# Altium PCB LPCB279R0__ASCII.PcbDoc
Units mm, origin at the board's own origin, x right, y up, seen from the top; angles counter-clockwise.
Board outline 96 x 109 mm, 2 copper layers (Top Layer, Bottom Layer); 115 components, 90 nets, 384 pads, 24 vias.
Unrouted connection lines stored in the file: 150.
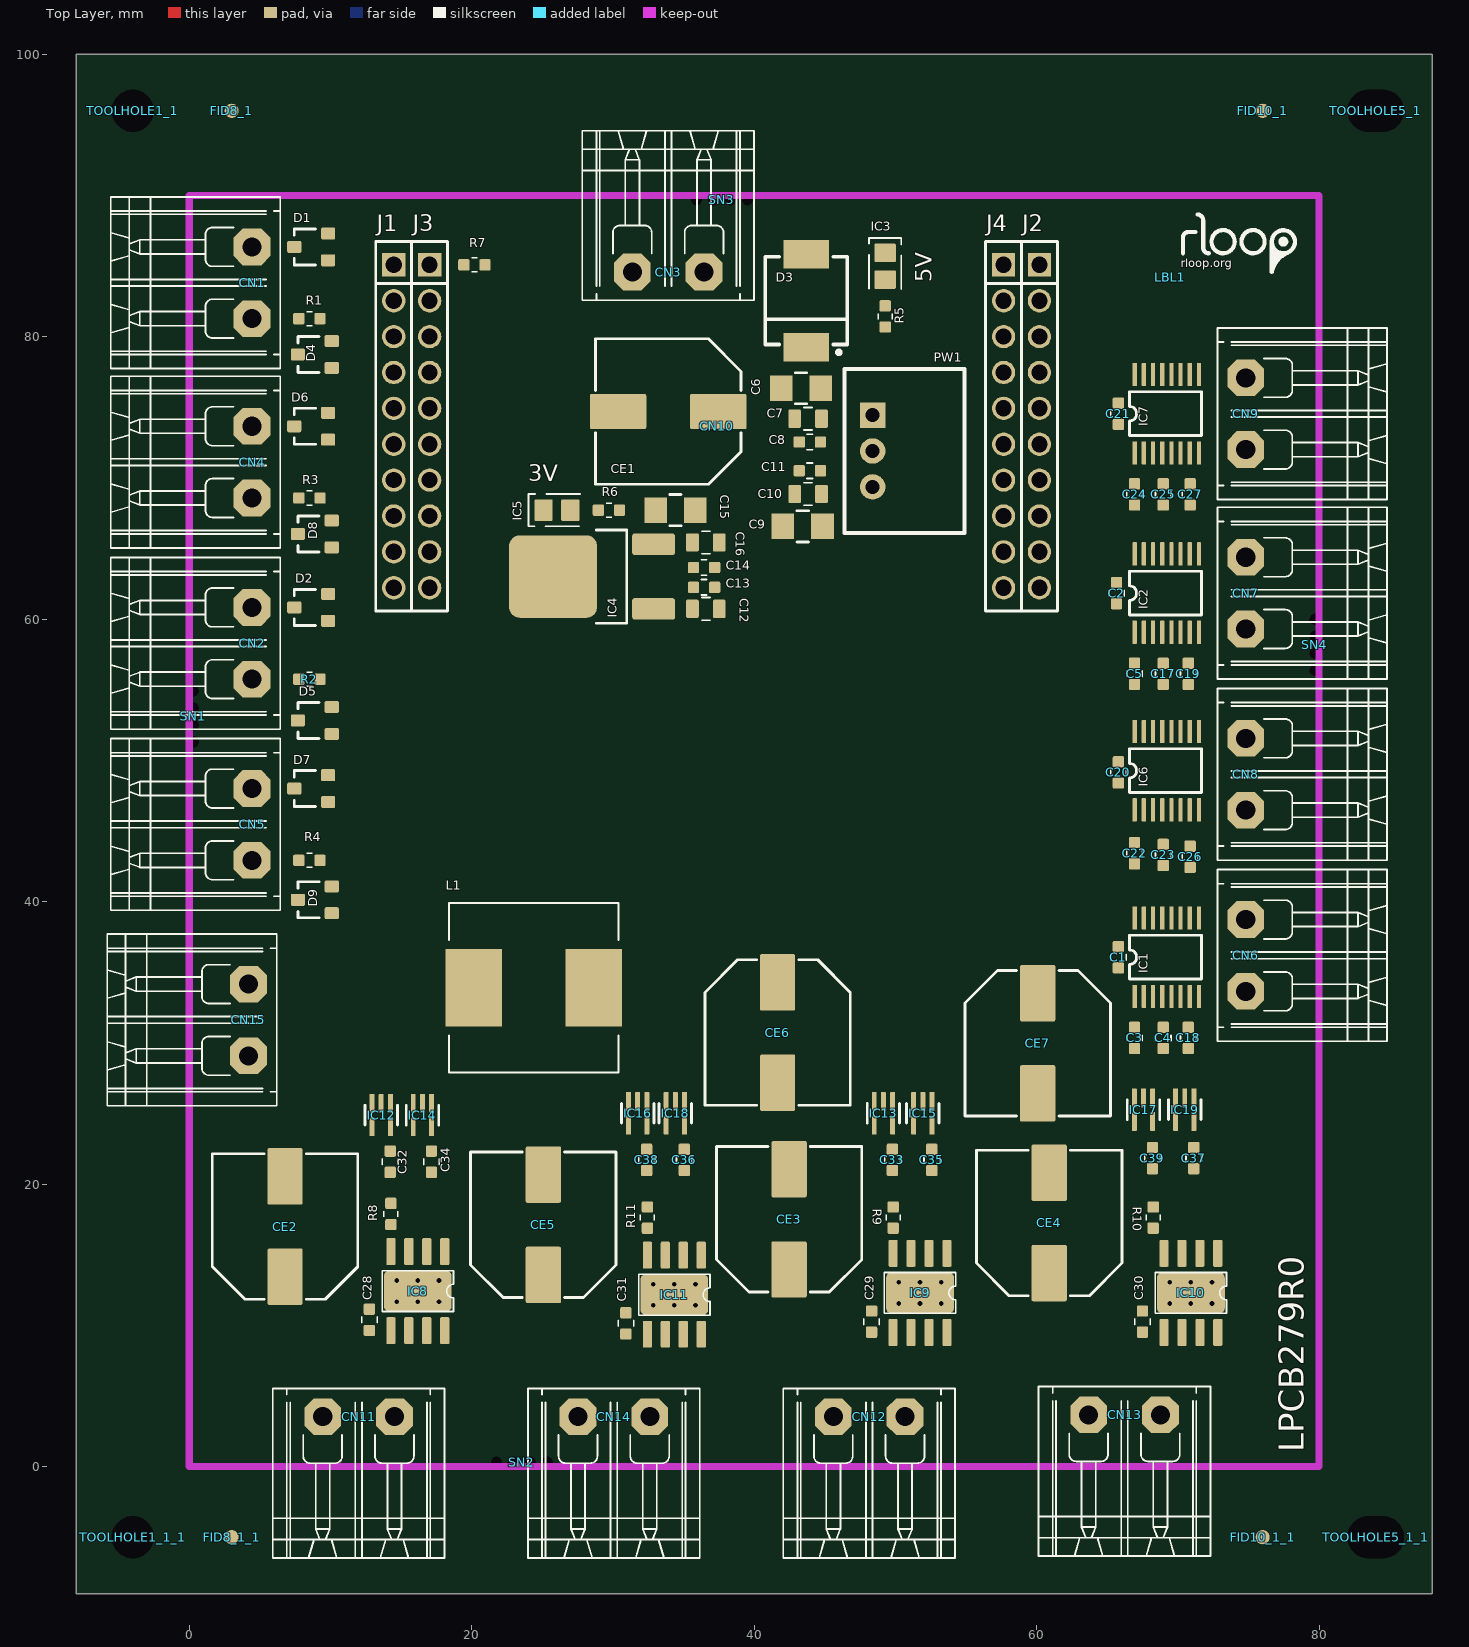
[diagram p0: Top Layer view]
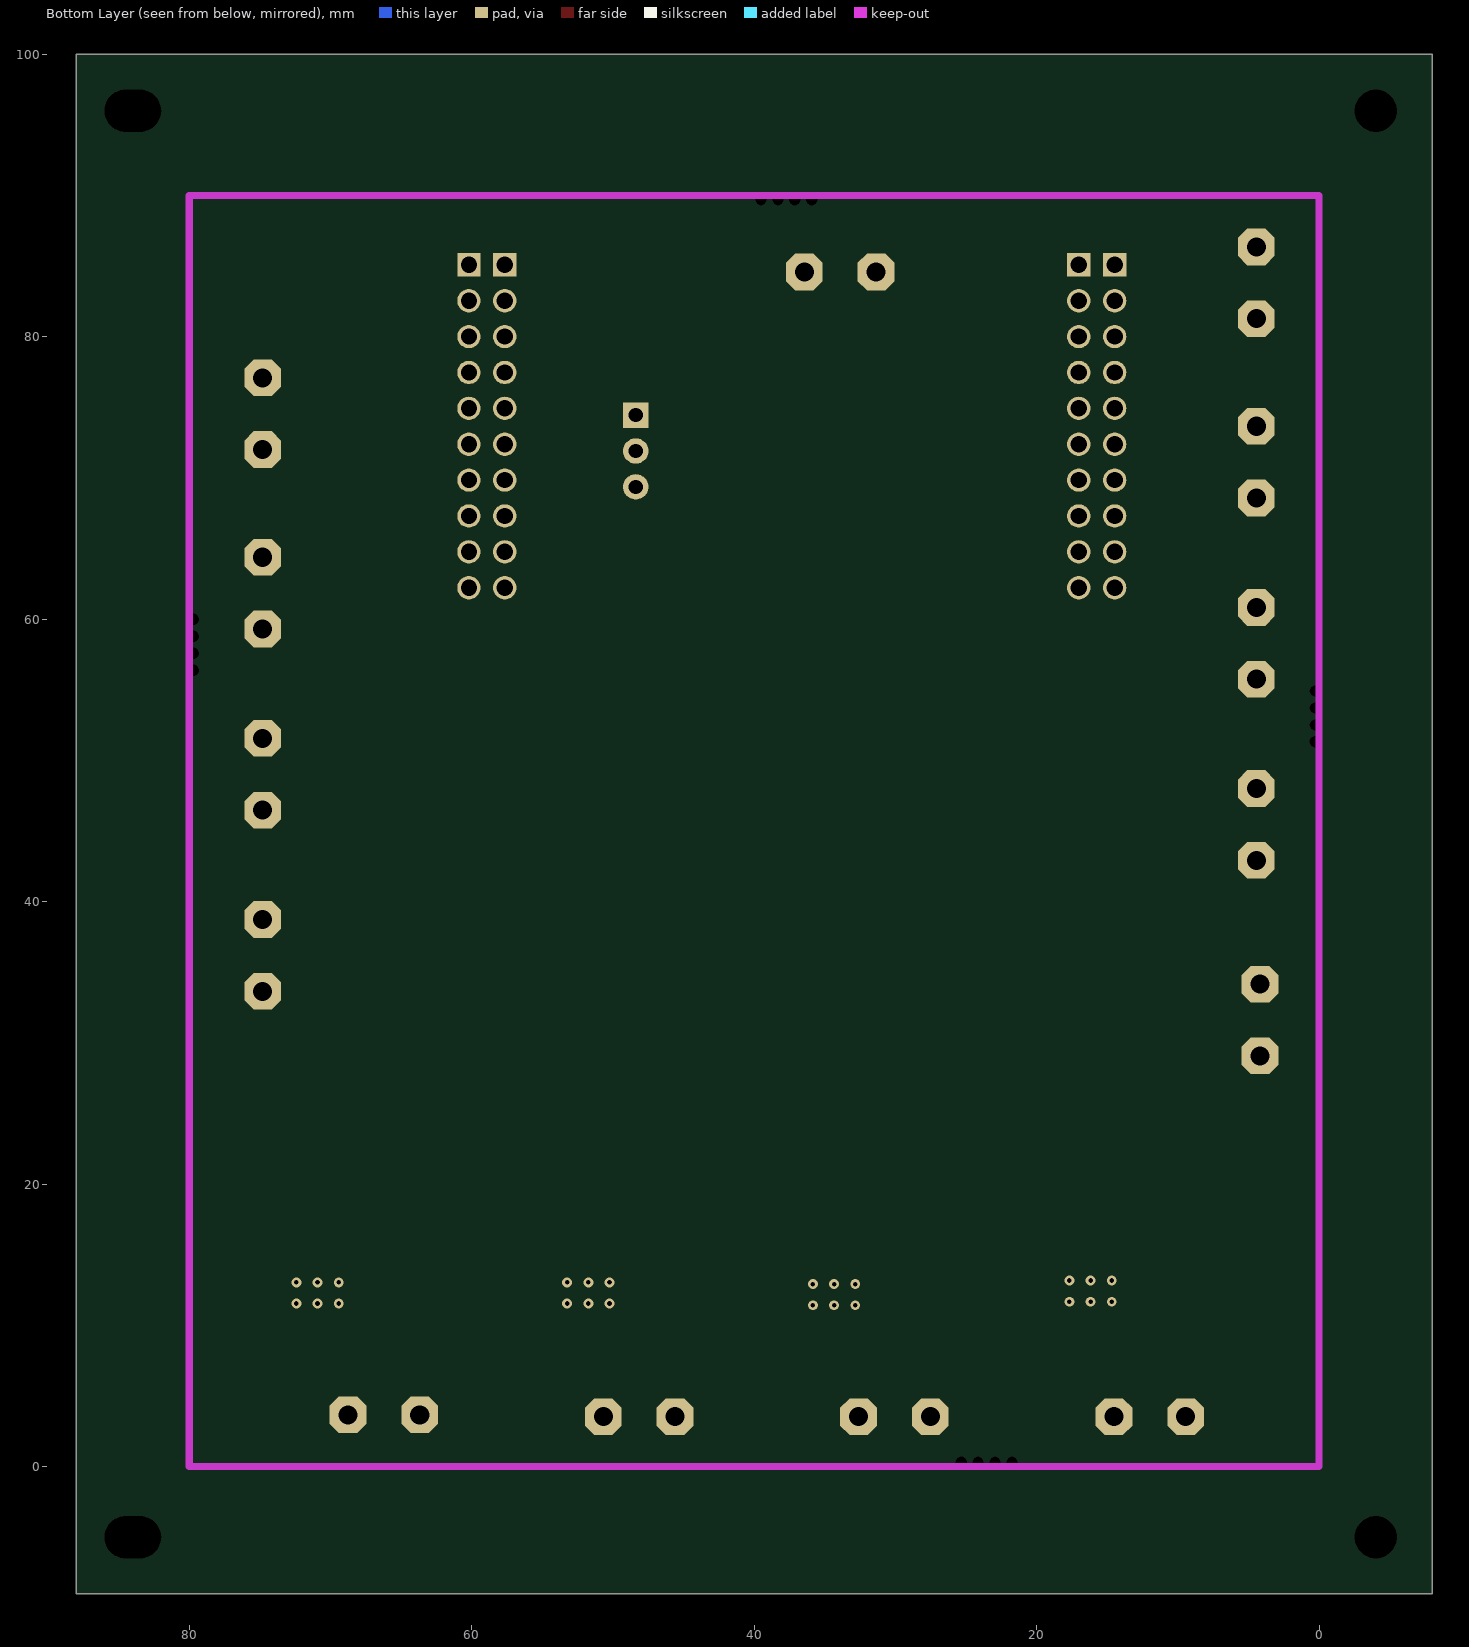
[diagram p1: Bottom Layer view, seen from below]

## Layer stack, top to bottom
Top Layer: signal copper 0.0356
Dielectric: dielectric 0.32, FR-4, Dk 4.8
Bottom Layer: signal copper 0.0356

## Board outline
-8,-9 -8,100 88,100 88,-9

## Design rules (kind name [scope] priority, off if disabled: settings)
AssemblyTestPointUsage [All] p0: scope1count=1 scope1_0_kind=Board scope1_0_value=Board scope2count=1 scope2_0_kind=Board scope2_0_value=Board commentlength=0
AssemblyTestpoint [All] p0: scope1count=1 scope1_0_kind=Board scope1_0_value=Board scope2count=1 scope2_0_kind=Board scope2_0_value=Board commentlength=0
Clearance [All] p0: scope1count=1 scope1_0_kind=Board scope1_0_value=Board scope2count=1 scope2_0_kind=Board scope2_0_value=Board commentlength=0 gap=0.16
Clearance [All] p1: gap=0.16
ComponentClearance [All] p0: scope1count=1 scope1_0_kind=Board scope1_0_value=Board scope2count=1 scope2_0_kind=Board scope2_0_value=Board commentlength=0 gap=0.254 collisioncheckmode=3
DiffPairsRouting [All] p0: scope1count=1 scope1_0_kind=Board scope1_0_value=Board scope2count=1 scope2_0_kind=Board scope2_0_value=Board commentlength=0
FabricationTestPointUsage [All] p0: scope1count=1 scope1_0_kind=Board scope1_0_value=Board scope2count=1 scope2_0_kind=Board scope2_0_value=Board commentlength=0 valid=0 allowmultiple=FALSE
FabricationTestpoint [All] p0: scope1count=1 scope1_0_kind=Board scope1_0_value=Board scope2count=1 scope2_0_kind=Board scope2_0_value=Board commentlength=0 side=3 testpointundercomponent=TRUE minsize=1.016 maxsize=2.54 preferedsize=1.524 minholesize=0 maxholesize=1.016 preferedholesize=0.813 testpointgrid=0.025
FanoutControl Fanout_Default [All] p0: scope1count=1 scope1_0_kind=Board scope1_0_value=Board scope2count=1 scope2_0_kind=Board scope2_0_value=Board commentlength=30 // Fanout_Default (Default Rule)
FanoutControl Fanout_Small [All] p0 off: scope1count=1 scope1_0_kind=Board scope1_0_value=Board scope2count=1 scope2_0_kind=Board scope2_0_value=Board commentlength=84 // Protel DXP Scope 1 Expression Was: (CompPinCount < 5)   Fanout_Small (Default Rule)
FanoutControl Fanout_SOIC [All] p0 off: scope1count=1 scope1_0_kind=Board scope1_0_value=Board scope2count=1 scope2_0_kind=Board scope2_0_value=Board commentlength=71 // Protel DXP Scope 1 Expression Was: IsSOIC   Fanout_SOIC (Default Rule)
FanoutControl Fanout_LCC [All] p0 off: scope1count=1 scope1_0_kind=Board scope1_0_value=Board scope2count=1 scope2_0_kind=Board scope2_0_value=Board commentlength=69 // Protel DXP Scope 1 Expression Was: IsLCC   Fanout_LCC (Default Rule)
FanoutControl Fanout_BGA [All] p0 off: scope1count=1 scope1_0_kind=Board scope1_0_value=Board scope2count=1 scope2_0_kind=Board scope2_0_value=Board commentlength=69 // Protel DXP Scope 1 Expression Was: IsBGA   Fanout_BGA (Default Rule)
Height [All] p0 off: scope1count=1 scope1_0_kind=Board scope1_0_value=Board scope2count=1 scope2_0_kind=Board scope2_0_value=Board commentlength=0
Height [All] p1 off: minheight=0 maxheight=25.4 prefheight=12.7
HoleSize [All] p0: scope1count=1 scope1_0_kind=Board scope1_0_value=Board scope2count=1 scope2_0_kind=Board scope2_0_value=Board commentlength=0 absolutevalues=TRUE maxlimit=6 minlimit=0.025 maxpercent=80.000 minpercent=20.000
HoleSize [All] p1: absolutevalues=TRUE maxlimit=6 minlimit=0.025 maxpercent=80.000 minpercent=20.000
HoleToHoleClearance [All] p0: scope1count=1 scope1_0_kind=Board scope1_0_value=Board scope2count=1 scope2_0_kind=Board scope2_0_value=Board commentlength=0
LayerPairs [All] p0: scope1count=1 scope1_0_kind=Board scope1_0_value=Board scope2count=1 scope2_0_kind=Board scope2_0_value=Board commentlength=0 enforce=TRUE
MinimumSolderMaskSliver [All] p0 off: scope1count=1 scope1_0_kind=Board scope1_0_value=Board scope2count=1 scope2_0_kind=Board scope2_0_value=Board commentlength=0
MinimumSolderMaskSliver [All] p1 off: minsoldermaskwidth=0.1
NetAntennae [All] p0: scope1count=1 scope1_0_kind=Board scope1_0_value=Board scope2count=1 scope2_0_kind=Board scope2_0_value=Board commentlength=0
PasteMaskExpansion [All] p0: scope1count=1 scope1_0_kind=Board scope1_0_value=Board scope2count=1 scope2_0_kind=Board scope2_0_value=Board commentlength=0 expansion=0
PlaneClearance [All] p0: scope1count=1 scope1_0_kind=Board scope1_0_value=Board scope2count=1 scope2_0_kind=Board scope2_0_value=Board commentlength=0 clearance=0.508
PlaneConnect [All] p0: scope1count=1 scope1_0_kind=Board scope1_0_value=Board scope2count=1 scope2_0_kind=Board scope2_0_value=Board commentlength=0 planeconnectstyle=Relief reliefexpansion=0.508 reliefentries=4 reliefconductorwidth=0.254 reliefairgap=0.254
PlaneConnect PlaneConnect_1 [All] p0 off: scope1count=1 scope1_0_kind=Board scope1_0_value=Board scope2count=1 scope2_0_kind=Board scope2_0_value=Board commentlength=44 planeconnectstyle=Direct reliefexpansion=0.508 reliefentries=4 reliefconductorwidth=0.254 reliefairgap=0.254 // Protel DXP Scope 1 Expression Was: IsVia
PlaneConnect PlaneConnect_1 [IsVia] p1: planeconnectstyle=Direct reliefexpansion=0.508 reliefentries=4 reliefconductorwidth=0.254 reliefairgap=0.254
PlaneConnect [All] p2: planeconnectstyle=Relief reliefexpansion=0.508 reliefentries=4 reliefconductorwidth=0.254 reliefairgap=0.254
PolygonConnect PolygonConnect_1 [All] p0: scope1count=1 scope1_0_kind=Board scope1_0_value=Board scope2count=1 scope2_0_kind=Board scope2_0_value=Board commentlength=0 connectstyle=Direct reliefconductorwidth=0.254 reliefentries=4 polygonreliefangle="90 Angle"
PolygonConnect [All] p0 off: scope1count=1 scope1_0_kind=Board scope1_0_value=Board scope2count=1 scope2_0_kind=Board scope2_0_value=Board commentlength=44 connectstyle=Direct reliefconductorwidth=0.254 reliefentries=4 polygonreliefangle="90 Angle" // Protel DXP Scope 1 Expression Was: IsVia
PolygonConnect [IsVia] p1: connectstyle=Direct reliefconductorwidth=0.254 reliefentries=4 polygonreliefangle="90 Angle" airgapwidth=0.254
PolygonConnect PolygonConnect_1 [All] p2: connectstyle=Direct reliefconductorwidth=0.254 reliefentries=4 polygonreliefangle="90 Angle" airgapwidth=0.254
RoomDefinition "U_LPCB279 - RM57 LAUNCH" [All] p0: scope1count=1 scope1_0_kind=ComponentClass scope1_0_value="U_LPCB279 - RM57 LAUNCH" scope2count=1 scope2_0_kind=Board scope2_0_value=Board commentlength=0 region_x1=96000000 region_y1=61950000 region_x2=108850000 region_y2=81750000 confinementstyle=ConfineIn
RoomDefinition "U_LPCB279 - HBRIDGE" [All] p0: scope1count=1 scope1_0_kind=ComponentClass scope1_0_value="U_LPCB279 - HBRIDGE" scope2count=1 scope2_0_kind=Board scope2_0_value=Board commentlength=0 region_x1=96000000 region_y1=50500000 region_x2=167950000 region_y2=56000000 confinementstyle=ConfineIn
RoomDefinition "U_LPCB279 - AND GATES" [All] p0: scope1count=1 scope1_0_kind=ComponentClass scope1_0_value="U_LPCB279 - AND GATES" scope2count=1 scope2_0_kind=Board scope2_0_value=Board commentlength=0 region_x1=95950000 region_y1=47600000 region_x2=116500000 region_y2=50000000 confinementstyle=ConfineIn
RoomDefinition "U_LPCB279 - ANALOG INPUTS" [All] p0: scope1count=1 scope1_0_kind=ComponentClass scope1_0_value="U_LPCB279 - ANALOG INPUTS" scope2count=1 scope2_0_kind=Board scope2_0_value=Board commentlength=0 region_x1=96000000 region_y1=44800000 region_x2=99550000 region_y2=47100000 confinementstyle=ConfineIn
RoomDefinition "LPCB279 - TOP" [All] p0: scope1count=1 scope1_0_kind=ComponentClass scope1_0_value="LPCB279 - TOP" scope2count=1 scope2_0_kind=Board scope2_0_value=Board commentlength=0 region_x1=0 region_y1=0 region_x2=20000000 region_y2=10000000 confinementstyle=ConfineIn
RoomDefinition "U_LPCB279 - POWER" [All] p0: scope1count=1 scope1_0_kind=ComponentClass scope1_0_value="U_LPCB279 - POWER" scope2count=1 scope2_0_kind=Board scope2_0_value=Board commentlength=0 region_x1=127450000 region_y1=67650000 region_x2=141600000 region_y2=87450000 confinementstyle=ConfineIn
RoomDefinition "U_LPCB279 - LIMIT SWITCHES" [All] p0: scope1count=1 scope1_0_kind=ComponentClass scope1_0_value="U_LPCB279 - LIMIT SWITCHES" scope2count=1 scope2_0_kind=Board scope2_0_value=Board commentlength=0 region_x1=127500000 region_y1=60100000 region_x2=193550000 region_y2=67700000 confinementstyle=ConfineIn
RoomDefinition "U_LPCB279 - RM57 LAUNCH" [InComponentClass('U_LPCB279 - RM57 LAUNCH')] p1: confinementstyle=ConfineIn formatcopy=TRUE lockcomponents=FALSE outline 89.155,66.085 121.794,66.085 121.794,116.377 89.155,116.377
RoomDefinition "U_LPCB279 - HBRIDGE" [InComponentClass('U_LPCB279 - HBRIDGE')] p2: confinementstyle=ConfineIn formatcopy=TRUE lockcomponents=FALSE outline 89.155,37.002 271.908,37.002 271.908,50.972 89.155,50.972
RoomDefinition "U_LPCB279 - AND GATES" [InComponentClass('U_LPCB279 - AND GATES')] p3: confinementstyle=ConfineIn formatcopy=TRUE lockcomponents=FALSE outline 89.028,29.636 141.225,29.636 141.225,35.732 89.028,35.732
RoomDefinition "U_LPCB279 - ANALOG INPUTS" [InComponentClass('U_LPCB279 - ANALOG INPUTS')] p4: confinementstyle=ConfineIn formatcopy=TRUE lockcomponents=FALSE outline 89.155,22.524 98.172,22.524 98.172,28.366 89.155,28.366
RoomDefinition "LPCB279 - TOP" [InComponentClass('LPCB279 - TOP')] p5: confinementstyle=ConfineIn formatcopy=TRUE lockcomponents=FALSE outline -154.685,-91.268 -103.885,-91.268 -103.885,-65.868 -154.685,-65.868
RoomDefinition "U_LPCB279 - POWER" [InComponentClass('U_LPCB279 - POWER')] p6: confinementstyle=ConfineIn formatcopy=TRUE lockcomponents=FALSE outline 169.038,80.563 204.979,80.563 204.979,130.855 169.038,130.855
RoomDefinition "U_LPCB279 - LIMIT SWITCHES" [InComponentClass('U_LPCB279 - LIMIT SWITCHES')] p7: confinementstyle=ConfineIn formatcopy=TRUE lockcomponents=FALSE outline 169.165,61.386 336.932,61.386 336.932,80.69 169.165,80.69
RoutingCorners [All] p0: scope1count=1 scope1_0_kind=Board scope1_0_value=Board scope2count=1 scope2_0_kind=Board scope2_0_value=Board commentlength=0 cornerstyle=45-Degree minsetback=2.54 maxsetback=2.54
RoutingLayers [All] p0: scope1count=1 scope1_0_kind=Board scope1_0_value=Board scope2count=1 scope2_0_kind=Board scope2_0_value=Board commentlength=0 top layer=Automatic bottom layer=Automatic
RoutingPriority [All] p0: scope1count=1 scope1_0_kind=Board scope1_0_value=Board scope2count=1 scope2_0_kind=Board scope2_0_value=Board commentlength=0
RoutingTopology [All] p0: scope1count=1 scope1_0_kind=Board scope1_0_value=Board scope2count=1 scope2_0_kind=Board scope2_0_value=Board commentlength=0 topology=Shortest
RoutingVias [All] p0: scope1count=1 scope1_0_kind=Board scope1_0_value=Board scope2count=1 scope2_0_kind=Board scope2_0_value=Board commentlength=0 holewidth=0.6 width=1.2 viastyle="Through Hole" minholewidth=0.3 minwidth=0.6 maxholewidth=1 maxwidth=2
RoutingVias [All] p1: holewidth=0.6 width=1.2 viastyle="Through Hole" minholewidth=0.3 minwidth=0.6 maxholewidth=1 maxwidth=2
ShortCircuit [All] p0: scope1count=1 scope1_0_kind=Board scope1_0_value=Board scope2count=1 scope2_0_kind=Board scope2_0_value=Board commentlength=0 allowed=FALSE
SilkToSilkClearance [All] p0 off: scope1count=1 scope1_0_kind=Board scope1_0_value=Board scope2count=1 scope2_0_kind=Board scope2_0_value=Board commentlength=0
SilkToSilkClearance [All] p1 off: silktosilkclearance=0.1
SilkToSolderMaskClearance [All] p0 off: scope1count=1 scope1_0_kind=Board scope1_0_value=Board scope2count=1 scope2_0_kind=Board scope2_0_value=Board commentlength=44 // Protel DXP Scope 1 Expression Was: IsPad
SilkToSolderMaskClearance [IsPad] p1 off: minsilkscreentomaskgap=0.1 clearancetoexposedcopper=TRUE
SolderMaskExpansion [All] p0: scope1count=1 scope1_0_kind=Board scope1_0_value=Board scope2count=1 scope2_0_kind=Board scope2_0_value=Board commentlength=0 expansion=0.102
SolderMaskExpansion [All] p1: expansion=0.102
UnRoutedNet [All] p0: scope1count=1 scope1_0_kind=Board scope1_0_value=Board scope2count=1 scope2_0_kind=Board scope2_0_value=Board commentlength=0
Width [All] p0: scope1count=1 scope1_0_kind=Board scope1_0_value=Board scope2count=1 scope2_0_kind=Board scope2_0_value=Board commentlength=0 maxlimit=1 minlimit=0.16 preferedwidth=0.2
Width [All] p1: maxlimit=1 minlimit=0.16 preferedwidth=0.2
22 further rules are at their usual default settings.

## Classes and differential pairs
component class "U_LPCB279 - RM57 LAUNCH": CN10 R7
component class "U_LPCB279 - LIMIT SWITCHES": C1 C2 C3 C4 C5 C17 C18 C19 C20 C21 C22 C23 C24 C25 C26 C27 CN6 CN7 CN8 CN9 IC1 IC2 IC6 IC7
component class "U_LPCB279 - AND GATES": C32 C33 C34 C35 C36 C37 C38 C39 IC12 IC13 IC14 IC15 IC16 IC17 IC18 IC19
component class "U_LPCB279 - HBRIDGE": C28 C29 C30 C31 CE2 CE3 CE4 CE5 CE6 CE7 CN11 CN12 CN13 CN14 CN15 IC8 IC9 IC10 IC11 L1 R8 R9 R10 R11
component class "U_LPCB279 - POWER": C6 C7 C8 C9 C10 C11 C12 C13 C14 C15 C16 CE1 CN3 D3 IC3 IC4 IC5 PW1 R5 R6
component class "U_LPCB279 - ANALOG INPUTS": CN1 CN2 CN4 CN5 D1 D2 D4 D5 D6 D7 D8 D9 R1 R2 R3 R4
component class "LPCB279 - TOP": LBL1 SN1 SN2 SN3 SN4

## Components (designator, comment, footprint, x,y, rotation, side; value= is the part's Value field where it differs from the comment)
C1 "100nF / 50V / 10% / SMD 0603" LFP011__CC1608-0603-IPC7351_B 65.786,36.068 r270 top
C2 "100nF / 50V / 10% / SMD 0603" LFP011__CC1608-0603-IPC7351_B 65.659,61.849 r270 top
C3 "100nF / 50V / 10% / SMD 0603" LFP011__CC1608-0603-IPC7351_B 66.929,30.353 r270 top
C4 "100nF / 50V / 10% / SMD 0603" LFP011__CC1608-0603-IPC7351_B 68.961,30.353 r270 top
C5 "100nF / 50V / 10% / SMD 0603" LFP011__CC1608-0603-IPC7351_B 66.929,56.134 r270 top
C6 "10uF / 50V / 10% / SMD 1206" LFP043__CC3216-1206 43.307,76.355 r180 top
C7 "1uF / 50V / 10% / SMD 0805" LFP010__CC2012-0805-IPC7351_B 43.815,74.196 r180 top
C8 "100nF / 50V / 10% / SMD 0603" LFP011__CC1608-0603-IPC7351_B 43.942,72.545 r180 top
C9 "10uF / 50V / 10% / SMD 1206" LFP043__CC3216-1206 43.434,66.576 r180 top
C10 "1uF / 50V / 10% / SMD 0805" LFP010__CC2012-0805-IPC7351_B 43.815,68.862 r180 top
C11 "100nF / 50V / 10% / SMD 0603" LFP011__CC1608-0603-IPC7351_B 43.942,70.513 r180 top
C12 "1uF / 50V / 10% / SMD 0805" LFP010__CC2012-0805-IPC7351_B 36.576,60.734 r0 top
C13 "100nF / 50V / 10% / SMD 0603" LFP011__CC1608-0603-IPC7351_B 36.449,62.258 r0 top
C14 "100nF / 50V / 10% / SMD 0603" LFP011__CC1608-0603-IPC7351_B 36.449,63.655 r0 top
C15 "10uF / 50V / 10% / SMD 1206" LFP043__CC3216-1206 34.417,67.719 r0 top
C16 "1uF / 50V / 10% / SMD 0805" LFP010__CC2012-0805-IPC7351_B 36.576,65.433 r0 top
C17 "100nF / 50V / 10% / SMD 0603" LFP011__CC1608-0603-IPC7351_B 68.961,56.134 r270 top
C18 "100nF / 50V / 10% / SMD 0603" LFP011__CC1608-0603-IPC7351_B 70.739,30.353 r270 top
C19 "100nF / 50V / 10% / SMD 0603" LFP011__CC1608-0603-IPC7351_B 70.739,56.134 r270 top
C20 "100nF / 50V / 10% / SMD 0603" LFP011__CC1608-0603-IPC7351_B 65.786,49.149 r270 top
C21 "100nF / 50V / 10% / SMD 0603" LFP011__CC1608-0603-IPC7351_B 65.786,74.549 r270 top
C22 "100nF / 50V / 10% / SMD 0603" LFP011__CC1608-0603-IPC7351_B 66.929,43.434 r270 top
C23 "100nF / 50V / 10% / SMD 0603" LFP011__CC1608-0603-IPC7351_B 68.961,43.307 r270 top
C24 "100nF / 50V / 10% / SMD 0603" LFP011__CC1608-0603-IPC7351_B 66.929,68.834 r270 top
C25 "100nF / 50V / 10% / SMD 0603" LFP011__CC1608-0603-IPC7351_B 68.961,68.834 r270 top
C26 "100nF / 50V / 10% / SMD 0603" LFP011__CC1608-0603-IPC7351_B 70.866,43.18 r270 top
C27 "100nF / 50V / 10% / SMD 0603" LFP011__CC1608-0603-IPC7351_B 70.866,68.834 r270 top
C28 "100nF / 50V / 10% / SMD 0603" LFP011__CC1608-0603-IPC7351_B 12.753,10.395 r90 top
C29 "100nF / 50V / 10% / SMD 0603" LFP011__CC1608-0603-IPC7351_B 48.313,10.268 r90 top
C30 "100nF / 50V / 10% / SMD 0603" LFP011__CC1608-0603-IPC7351_B 67.49,10.268 r90 top
C31 "100nF / 50V / 10% / SMD 0603" LFP011__CC1608-0603-IPC7351_B 30.914,10.141 r90 top
C32 "100nF / 50V / 10% / SMD 0603" LFP011__CC1608-0603-IPC7351_B 14.224,21.59 r270 top
C33 "100nF / 50V / 10% / SMD 0603" LFP011__CC1608-0603-IPC7351_B 49.784,21.717 r270 top
C34 "100nF / 50V / 10% / SMD 0603" LFP011__CC1608-0603-IPC7351_B 17.145,21.59 r270 top
C35 "100nF / 50V / 10% / SMD 0603" LFP011__CC1608-0603-IPC7351_B 52.578,21.717 r270 top
C36 "100nF / 50V / 10% / SMD 0603" LFP011__CC1608-0603-IPC7351_B 35.052,21.717 r270 top
C37 "100nF / 50V / 10% / SMD 0603" LFP011__CC1608-0603-IPC7351_B 71.12,21.844 r270 top
C38 "100nF / 50V / 10% / SMD 0603" LFP011__CC1608-0603-IPC7351_B 32.385,21.717 r270 top
C39 "100nF / 50V / 10% / SMD 0603" LFP011__CC1608-0603-IPC7351_B 68.199,21.844 r270 top
CE1 "330uF / 35V / 20% / SMD 10x10" LFP041__NICHICON_WT_10X10 33.909,74.704 r180 top
CE2 "330uF / 35V / 20% / SMD 10x10" LFP041__NICHICON_WT_10X10 6.784,16.999 r90 top
CE3 "330uF / 35V / 20% / SMD 10x10" LFP041__NICHICON_WT_10X10 42.471,17.507 r90 top
CE4 "330uF / 35V / 20% / SMD 10x10" LFP041__NICHICON_WT_10X10 60.886,17.253 r90 top
CE5 "330uF / 35V / 20% / SMD 10x10" LFP041__NICHICON_WT_10X10 25.072,17.126 r90 top
CE6 "330uF / 35V / 20% / SMD 10x10" LFP041__NICHICON_WT_10X10 41.656,30.734 r270 top
CE7 "330uF / 35V / 20% / SMD 10x10" LFP041__NICHICON_WT_10X10 60.071,29.972 r270 top
CN1 "691 313 510 002" "691 313 510 002" 4.445,86.36 r270 top
CN2 "691 313 510 002" "691 313 510 002" 4.445,60.833 r270 top
CN3 "691 313 510 002" "691 313 510 002" 36.449,84.582 r180 top
CN4 "691 313 510 002" "691 313 510 002" 4.445,73.66 r270 top
CN5 "691 313 510 002" "691 313 510 002" 4.445,48.006 r270 top
CN6 "691 313 510 002" "691 313 510 002" 74.803,33.655 r90 top locked
CN7 "691 313 510 002" "691 313 510 002" 74.803,59.309 r90 top locked
CN8 "691 313 510 002" "691 313 510 002" 74.803,46.482 r90 top locked
CN9 "691 313 510 002" "691 313 510 002" 74.803,72.009 r90 top locked
CN10 "RM57LAUNCHXL_BP_40P_1" RM57LAUNCHXL_BP_40P_1 14.478,85.09 r0 top locked
CN11 "691 313 510 002" "691 313 510 002" 9.451,3.537 r0 top
CN12 "691 313 510 002" "691 313 510 002" 45.604,3.537 r0 top
CN13 "691 313 510 002" "691 313 510 002" 63.68,3.664 r0 top
CN14 "691 313 510 002" "691 313 510 002" 27.527,3.537 r0 top
CN15 "691 313 510 002" "691 313 510 002" 4.191,34.163 r270 top locked
D1 "BAS16" LFP021__SOT23 8.636,86.36 r90 top
D2 "BAS16" LFP021__SOT23 8.636,60.833 r90 top
D3 "S3M-E3/57T" LFP040__DO-214AB 43.688,82.55 r90 top
D4 "MMBZ5226BLT1G" LFP021__SOT23 8.89,78.74 r90 top
D5 "MMBZ5226BLT1G" LFP021__SOT23 8.89,52.832 r90 top
D6 "BAS16" LFP021__SOT23 8.636,73.66 r90 top
D7 "BAS16" LFP021__SOT23 8.636,48.006 r90 top
D8 "MMBZ5226BLT1G" LFP021__SOT23 8.89,66.04 r90 top
D9 "MMBZ5226BLT1G" LFP021__SOT23 8.89,40.132 r90 top
FID8_1 "FIDUCIAL" LFP113__FIDUCIAL 3,96 r0 top
FID8_1_1 "FIDUCIAL" LFP113__FIDUCIAL 3,-5 r0 top
FID10_1 "FIDUCIAL" LFP113__FIDUCIAL 76,96 r0 top
FID10_1_1 "FIDUCIAL" LFP113__FIDUCIAL 76,-5 r0 top
IC1 "MAX3232CPWR" LFP049__TSSOP-16 69.215,36.068 r0 top
IC2 "MAX3232CPWR" LFP049__TSSOP-16 69.215,61.849 r0 top
IC3 "EL-17-21VGC/TR8" CR2012-0805-LED 49.276,84.991 r270 top
IC4 "NCV4274DT33RKG" LFP019__369A-13 28.321,63.02 r90 top
IC5 "EL-17-21VGC/TR8" CR2012-0805-LED 26.035,67.719 r0 top
IC6 "MAX3232CPWR" LFP049__TSSOP-16 69.215,49.276 r0 top
IC7 "MAX3232CPWR" LFP049__TSSOP-16 69.215,74.549 r0 top locked
IC8 "DRV8871DDARQ1" LFP158__DDA_R-PDSO-G8 16.182,12.427 r180 top
IC9 "DRV8871DDARQ1" LFP158__DDA_R-PDSO-G8 51.742,12.3 r180 top
IC10 "DRV8871DDARQ1" LFP158__DDA_R-PDSO-G8 70.919,12.3 r180 top
IC11 "DRV8871DDARQ1" LFP158__DDA_R-PDSO-G8 34.343,12.173 r180 top
IC12 "74LVC1G08GW,125" LFP047__SOT353 13.589,24.892 r180 top
IC13 "74LVC1G08GW,125" LFP047__SOT353 49.149,25.019 r180 top
IC14 "74LVC1G08GW,125" LFP047__SOT353 16.51,24.892 r180 top
IC15 "74LVC1G08GW,125" LFP047__SOT353 51.943,25.019 r180 top
IC16 "74LVC1G08GW,125" LFP047__SOT353 31.75,25.019 r180 top
IC17 "74LVC1G08GW,125" LFP047__SOT353 67.564,25.273 r180 top
IC18 "74LVC1G08GW,125" LFP047__SOT353 34.417,25.019 r180 top
IC19 "74LVC1G08GW,125" LFP047__SOT353 70.485,25.273 r180 top
L1 "MSS1278T-103MLB" LFP037__MSS1278T 24.384,33.909 r0 top
LBL1 "RLOOP_LOGO" RLOOP_LOGO 69.469,84.201 r0 top
PW1 "173010542" 173010542 48.387,71.91 r270 top
R1 "160R / 0.1W / 1% / SMD 0603" LFP020__CR1608-0603-IPC7351_B 8.509,81.28 r180 top
R2 "160R / 0.1W / 1% / SMD 0603" LFP020__CR1608-0603-IPC7351_B 8.509,55.753 r180 top
R3 "160R / 0.1W / 1% / SMD 0603" LFP020__CR1608-0603-IPC7351_B 8.509,68.58 r180 top
R4 "160R / 0.1W / 1% / SMD 0603" LFP020__CR1608-0603-IPC7351_B 8.509,42.926 r180 top
R5 "2.2K / 0.1W / 1% / SMD 0603" LFP020__CR1608-0603-IPC7351_B 49.276,81.435 r270 top
R6 "2.2K / 0.1W / 1% / SMD 0603" LFP020__CR1608-0603-IPC7351_B 29.718,67.719 r0 top
R7 "0R / 0.1W / SMD 0603" LFP020__CR1608-0603-IPC7351_B 20.193,85.09 r0 top
R8 "30K / 0.1W / 1% / SMD 0603" LFP020__CR1608-0603-IPC7351_B 14.277,17.888 r270 top
R9 "30K / 0.1W / 1% / SMD 0603" LFP020__CR1608-0603-IPC7351_B 49.837,17.634 r270 top
R10 "30K / 0.1W / 1% / SMD 0603" LFP020__CR1608-0603-IPC7351_B 68.252,17.634 r270 top
R11 "30K / 0.1W / 1% / SMD 0603" LFP020__CR1608-0603-IPC7351_B 32.438,17.634 r270 top
SN1 "PCB_SNAPOUT_0.3MM" PCB_SNAPOUT_0.3MM 0,53.114 r270 top
SN2 "PCB_SNAPOUT_0.3MM" PCB_SNAPOUT_0.3MM 23.548,0 r0 top
SN3 "PCB_SNAPOUT_0.3MM" PCB_SNAPOUT_0.3MM 37.719,90 r180 top
SN4 "PCB_SNAPOUT_0.3MM" PCB_SNAPOUT_0.3MM 80,58.194 r90 top
TOOLHOLE1_1 "Comment" TOOL-1#1 -4,96 r0 top
TOOLHOLE1_1_1 "Comment" TOOL-1#1 -4,-5 r0 top
TOOLHOLE5_1 "Comment" TOOL-1#2 84,96 r0 top
TOOLHOLE5_1_1 "Comment" TOOL-1#2 84,-5 r0 top

## Footprints (in the part's own frame and the unit in brackets; to place one, negate y for a bottom-side part, rotate by r counter-clockwise, add the part's x,y. Pads: shape width x height; smd on the part's side, far side on the other; paste and mask are expansions set on the pad)
"691 313 510 002" [mm] "Connector, Pluggable Terminal Block, 5.08mm, 2 Way, PTH"
  oct 2.6x2.6 hole 1.35: 1(0,0) 2(5.08,0)
  silkscreen extent -3.54,-10 8.62,2
173010542 [mm]
  rect 1.8x1.8 hole 1 paste-0.01: 1(-2.54,0)
  round 1.8 hole 1 paste-0.01: 2(0,0) 3(2.54,0)
  silkscreen extent -5.8,-2 5.8,6.5
CR2012-0805-LED [mm]
  rrect10% 1.3x1.5 smd paste-0.05: A(0.95,0) K(-0.95,0)
  silkscreen extent -2.01,-1.14 1.63,1.14
LFP010__CC2012-0805-IPC7351_B [mm]
  rrect25% 0.9x1.3 smd paste-0.01: 1(-0.95,0) 2(0.95,0)
  silkscreen extent -0.3,-0.8 0.3,0.8
LFP011__CC1608-0603-IPC7351_B [mm]
  rrect25% 0.8x0.8 smd: 1(-0.75,0) 2(0.75,0)
  silkscreen extent -0.2,-0.55 0.2,0.55
LFP019__369A-13 [mil]
  rrect25% 60x120 smd: 1(-90,-179.49) 3(90,-179.49)
  rrect25% 230x245 smd paste-196.85: 4(0,100.75)
  silkscreen extent -130,-104 130,-19
LFP020__CR1608-0603-IPC7351_B [mm]
  rrect25% 0.8x0.8 smd: 1(-0.75,0) 2(0.75,0)
  silkscreen extent -0.2,-0.5 0.2,0.5
LFP021__SOT23 [mm] "SOT-23; 3 Leads; Body 3.0 x 2.5 mm, inc. leads (LxW max)"
  rrect25% 0.85x1 smd paste-0.05: 1(-0.95,-1.2) 2(0.95,-1.2) 3(0,1.2)
  silkscreen extent -1.27,-0.3 1.28,1.2
LFP037__MSS1278T [mm]
  rect 4x5.5 smd: 1(-4.25,0) 2(4.25,0)
  silkscreen extent -6,-6 6,6
LFP040__DO-214AB [mm]
  rect 2.032x3.2 smd: 1(-3.3,0) 2(3.3,0)
  silkscreen extent -3.8,-2.9 3.1,2.9
LFP041__NICHICON_WT_10X10 [mm]
  rrect10% 4x2.5 smd paste-0.02: 1(-3.55,0) 2(3.55,0)
  silkscreen extent -5.15,-5.15 5.15,5.15
LFP043__CC3216-1206 [mm]
  rect 1.6x1.8 smd paste-0.01: 1(-1.4,0) 2(1.4,0)
  silkscreen extent -0.4,-1.1 0.4,1.1
LFP047__SOT353 [mm] "SOT-353/SC-88A; 5 Leads; Body 2.2 x 2.2 mm, inc. leads (LxW max)"
  rrect25% 0.35x1.35 smd paste-0.03: 1(-0.65,-0.825) 2(0,-0.825) 3(0.65,-0.825) 4(0.65,0.825) 5(-0.65,0.825)
  silkscreen extent -1.15,-0.7 1.15,0.7
LFP049__TSSOP-16 [mm] "Copied from 984E-02"
  rrect25% 0.3x1.65 smd paste-0.03: 1(-2.275,-2.775) 2(-1.625,-2.775) 3(-0.975,-2.775) 4(-0.325,-2.775) 5(0.325,-2.775) 6(0.975,-2.775) 7(1.625,-2.775) 8(2.275,-2.775) 9(2.275,2.775) 10(1.625,2.775) 11(0.975,2.775) 12(0.325,2.775) 13(-0.325,2.775) 14(-0.975,2.775) 15(-1.625,2.775) 16(-2.275,2.775)
  silkscreen extent -2.65,-1.55 2.45,1.55
LFP113__FIDUCIAL [mm]
  round 1 smd paste-2 mask+1.5: 0(0,0)
LFP158__DDA_R-PDSO-G8 [mm]
  rrect25% 0.65x1.9 smd paste-0.05: 1(-1.905,-2.8) 2(-0.635,-2.8) 3(0.635,-2.8) 4(1.905,-2.8) 5(1.905,2.8) 6(0.635,2.8) 7(-0.635,2.8) 8(-1.905,2.8)
  rrect25% 4.8x2.9 smd paste-5: PAD(0,0)
  silkscreen extent -2.52,-1.45 2.52,1.45
PCB_SNAPOUT_0.3MM [mm]
  round 0.4 hole 0.8 unplated: 0(-1.8,0.3) 0(-0.6,0.3) 0(0.6,0.3) 0(1.8,0.3)
RLOOP_LOGO [mm]
  silkscreen extent 0.89,0.39 8.82,4.45
RM57LAUNCHXL_BP_40P_1 [mm]
  rect 1.65x1.65 hole 1.15: J1_1(0,0) J2_1(45.72,0) J3_1(2.54,0) J4_1(43.18,0)
  round 1.65 hole 1.15: J1_2(0,-2.54) J1_3(0,-5.08) J1_4(0,-7.62) J1_5(0,-10.16) J1_6(0,-12.7) J1_7(0,-15.24) J1_8(0,-17.78) J1_9(0,-20.32) J1_10(0,-22.86) J2_2(45.72,-2.54) J2_3(45.72,-5.08) J2_4(45.72,-7.62) J2_5(45.72,-10.16) J2_6(45.72,-12.7) J2_7(45.72,-15.24) J2_8(45.72,-17.78) J2_9(45.72,-20.32) J2_10(45.72,-22.86) J3_2(2.54,-2.54) J3_3(2.54,-5.08) J3_4(2.54,-7.62) J3_5(2.54,-10.16) J3_6(2.54,-12.7) J3_7(2.54,-15.24) J3_8(2.54,-17.78) J3_9(2.54,-20.32) J3_10(2.54,-22.86) J4_2(43.18,-2.54) J4_3(43.18,-5.08) J4_4(43.18,-7.62) J4_5(43.18,-10.16) J4_6(43.18,-12.7) J4_7(43.18,-15.24) J4_8(43.18,-17.78) J4_9(43.18,-20.32) J4_10(43.18,-22.86)
  silkscreen extent -1.27,-24.51 46.99,1.65
TOOL-1#1 [mm]
  round 2.54 hole 3 unplated: TOOL(0,0)
TOOL-1#2 [mm]
  round 0.076 hole 3 slot 4 at 0 deg unplated: TOOL1(0,0)

## Part data
C1 C2 C3 C4 C5 C8 C11 C13 C14 C17 C18 C19 C20 C21 C22 C23 C24 C25 C26 C27 C28 C29 C30 C31 C32 C33 C34 C35 C36 C37 C38 C39: "Capacitor, Ceramic Chip, 100nF (0.1uF), 50V, 5%, SMD 0603 [LCA016]"
C6 C9 C15: "Capacitor, Ceramic Chip, 10uF, 50V, X5R, 10%, SMD 1206 [LCA144]"
C7 C10 C12 C16: "Capacitor, Ceramic Chip, 1uF, 50V, SMD 0805 [LCA098]"
CE1 CE2 CE3 CE4 CE5 CE6 CE7: "Capacitor, Aluminum Electrolytic, 330uF, 35V, 20%, SMD (10mm x 10mm) [LCA071]"
CN1 CN2 CN3 CN4 CN5 CN6 CN7 CN8 CN9 CN11 CN12 CN13 CN14 CN15: "Connector, Pluggable Terminal Block, 5.08mm, 2 Way, PTH"
CN10: "Connector, RM57L843 LaunchXL, 40Pin Boosterpack Site1"
D1 D2 D6 D7: "Diode, Small Signal, 0.2A, 85V, SMD SOT-23 [LIC006]"
D3: "Diode, General Purpose Rectifier, 3A, 200V, SMD DO-214AB [LIC189]"
D4 D5 D8 D9: "Diode, Zener, 3.3V, 0.225W, SMD [LIC288]"
IC1 IC2 IC6 IC7: "IC, RS232 Line Driver, 3.3V, SMD TSSOP16 [LIC165]"
IC3 IC5: "LED, SMD, 0805 Green [LIC016]"
IC4: "IC, Voltage Regulator, 400mA, 3.3V LDO, SMD DPAK [LIC233]"
IC8 IC9 IC10 IC11: "IC, DC Motor Driver, 3.6A, SMD [LIC689]"
IC12 IC13 IC14 IC15 IC16 IC17 IC18 IC19: "IC, Logic AND Gate, Single 2 Input, SMD SOT353 [LIC239]"
L1: "Inductor, 10uH, 20%, 5.7A, SMD [LIN031]"
R1 R2 R3 R4: "Resistor, Ceramic Chip, 160R, 0.1W, 1%, SMD 0603 [LRE253]"
R5 R6: "Resistor, Ceramic Chip, 2.2K, 0.1W, 1%, SMD 0603 [LRE027]"
R7: "Resistor, Ceramic Chip, 0R, 0.1W, SMD 0603 [LRE026]"
R8 R9 R10 R11: "Resistor, Ceramic Chip, 30K, 0.1W, 1%, SMD 0603 [LRE120]"
SN1 SN2 SN3 SN4: "PCB Snapout + 0.3mm"

## Via types
v1: diameter 0.7, hole 0.33, Top Layer to Bottom Layer, tented bottom, 24 vias

## Nets (pads, with @x,y where several pads share a name; then routed paths per layer and width w, separated by ;. In a path a pad name is that pad's centre, name@x,y a point inside that pad or via, vN(x,y) a via of type N, cw(c..) or ccw(c..) an arc to the next point about the centre after c; other vN are vias at no path point)
BRIDGE_DIR_A1: CN10.J4_2 IC12.1
BRIDGE_DIR_A2: CN10.J4_5 IC16.1
BRIDGE_DIR_A3: CN10.J1_9 IC13.1
BRIDGE_DIR_A4: CN10.J2_2 IC17.1
BRIDGE_DIR_B1: CN10.J1_3 IC14.1
BRIDGE_DIR_B2: CN10.J1_4 IC18.1
BRIDGE_DIR_B3: CN10.J2_8 IC15.1
BRIDGE_DIR_B4: CN10.J2_9 IC19.1
BRIDGE_PWM_1: CN10.J4_1 IC12.2 IC14.2
BRIDGE_PWM_2: CN10.J4_3 IC16.2 IC18.2
BRIDGE_PWM_3: CN10.J4_6 IC13.2 IC15.2
BRIDGE_PWM_4: CN10.J1_10 IC17.2 IC19.2
D3V3: C1.1 C2.1 C14.1 C15.1 C16.1 C20.1 C21.1 C32.1 C33.1 C34.1 C35.1 C36.1 C37.1 C38.1 C39.1 IC1.16 IC2.16 IC4.3 IC6.16 IC7.16 IC12.5 IC13.5 IC14.5 IC15.5 IC16.5 IC17.5 IC18.5 IC19.5 R6.2
DGND: C6.2 C7.2 C8.2 C9.2 C10.2 C11.2 C12.2 C13.2 C14.2 C15.2 C16.2 C18.2 C19.2 C26.2 C27.2 C28.2 C29.2 C30.2 C31.2 C32.2 C33.2 C34.2 C35.2 C36.2 C37.2 C38.2 C39.2 CE1.2 CE2.2 CE3.2 CE4.2 CE5.2 CE6.2 CE7.2 CN3.2 CN10.J2_1 CN10.J3_2 CN15.2 D4.1 D5.1 D8.1 D9.1 IC1.10 IC1.11 IC1.15 IC2.10 IC2.11 IC2.15 IC3.K IC4.4 IC5.K IC6.10 IC6.11 IC6.15 IC7.10 IC7.11 IC7.15 IC8.1 IC8.7 IC8.PAD IC9.1 IC9.7 IC9.PAD IC10.1 IC10.7 IC10.PAD IC11.1 IC11.7 IC11.PAD IC12.3 IC13.3 IC14.3 IC15.3 IC16.3 IC17.3 IC18.3 IC19.3 PW1.2 R1.1 R2.1 R3.1 R4.1 R8.1 R9.1 R10.1 R11.1
  other v1: 32.843,11.423 34.343,11.423 35.843,11.423 50.242,11.55 51.742,11.55 53.242,11.55 69.419,11.55 70.919,11.55 72.419,11.55 14.682,11.677 16.182,11.677 17.682,11.677 32.843,12.923 34.343,12.923 35.843,12.923 50.242,13.05 51.742,13.05 53.242,13.05 69.419,13.05 70.919,13.05 72.419,13.05 14.682,13.177 16.182,13.177 17.682,13.177
NetC1_2: C1.2 IC1.2
NetC2_2: C2.2 IC2.2
NetC3_1: C3.1 IC1.1
NetC3_2: C3.2 IC1.3
NetC4_1: C4.1 IC1.4
NetC4_2: C4.2 IC1.5
NetC5_1: C5.1 IC2.1
NetC5_2: C5.2 IC2.3
NetC17_1: C17.1 IC2.4
NetC17_2: C17.2 IC2.5
NetC18_1: C18.1 IC1.6
NetC19_1: C19.1 IC2.6
NetC20_2: C20.2 IC6.2
NetC21_2: C21.2 IC7.2
NetC22_1: C22.1 IC6.1
NetC22_2: C22.2 IC6.3
NetC23_1: C23.1 IC6.4
NetC23_2: C23.2 IC6.5
NetC24_1: C24.1 IC7.1
NetC24_2: C24.2 IC7.3
NetC25_1: C25.1 IC7.4
NetC25_2: C25.2 IC7.5
NetC26_1: C26.1 IC6.6
NetC27_1: C27.1 IC7.6
NetCN1_1: CN1.1 D1.3
NetCN1_2: CN1.2 CN10.J3_5 D4.3 R1.2
NetCN2_1: CN2.1 D2.3
NetCN2_2: CN2.2 CN10.J3_7 D5.3 R2.2
NetCN3_1: CN3.1 D3.2
NetCN4_1: CN4.1 D6.3
NetCN4_2: CN4.2 CN10.J3_6 D8.3 R3.2
NetCN5_1: CN5.1 D7.3
NetCN5_2: CN5.2 CN10.J3_8 D9.3 R4.2
NetCN6_1: CN6.1 IC1.8
NetCN6_2: CN6.2 IC1.13
NetCN7_1: CN7.1 IC2.8
NetCN7_2: CN7.2 IC2.13
NetCN8_1: CN8.1 IC6.8
NetCN8_2: CN8.2 IC6.13
NetCN9_1: CN9.1 IC7.8
NetCN9_2: CN9.2 IC7.13
NetCN10_J3_1: CN10.J3_1 R7.1
NetCN11_1: CN11.1 IC8.6
NetCN11_2: CN11.2 IC8.8
NetCN12_1: CN12.1 IC9.6
NetCN12_2: CN12.2 IC9.8
NetCN13_1: CN13.1 IC10.6
NetCN13_2: CN13.2 IC10.8
NetCN14_1: CN14.1 IC11.6
NetCN14_2: CN14.2 IC11.8
NetCN15_1: CN15.1 L1.1
NetIC3_A: IC3.A R5.1
NetIC5_A: IC5.A R6.1
NetIC8_2: IC8.2 IC14.4
NetIC8_3: IC8.3 IC12.4
NetIC8_4: IC8.4 R8.2
NetIC9_2: IC9.2 IC15.4
NetIC9_3: IC9.3 IC13.4
NetIC9_4: IC9.4 R9.2
NetIC10_2: IC10.2 IC19.4
NetIC10_3: IC10.3 IC17.4
NetIC10_4: IC10.4 R10.2
NetIC11_2: IC11.2 IC18.4
NetIC11_3: IC11.3 IC16.4
NetIC11_4: IC11.4 R11.2
P5V: C9.1 C10.1 C11.1 PW1.3 R7.2
P24V: C6.1 C7.1 C8.1 C12.1 C13.1 CE1.1 D1.1 D2.1 D3.1 D6.1 D7.1 IC4.1 PW1.1 R5.2
SW_EXT_1: CN10.J4_10 IC1.12
SW_EXT_2: CN10.J2_10 IC6.12
SW_EXT_3: CN10.J1_8 IC2.12
SW_EXT_4: CN10.J4_8 IC7.12
SW_RET_1: CN10.J4_9 IC1.9
SW_RET_2: CN10.J2_4 IC6.9
SW_RET_3: CN10.J1_5 IC2.9
SW_RET_4: CN10.J4_7 IC7.9
VMOTOR: C28.1 C29.1 C30.1 C31.1 CE2.1 CE3.1 CE4.1 CE5.1 CE6.1 CE7.1 IC8.5 IC9.5 IC10.5 IC11.5 L1.2
pads on no net: CN10.J1_1 CN10.J1_2 CN10.J1_6 CN10.J1_7 CN10.J2_3 CN10.J2_5 CN10.J2_6 CN10.J2_7 CN10.J3_3 CN10.J3_4 CN10.J3_9 CN10.J3_10 CN10.J4_4 D1.2 D2.2 D4.2 D5.2 D6.2 D7.2 D8.2 D9.2 FID8_1.0 FID8_1_1.0 FID10_1.0 FID10_1_1.0 IC1.7 IC1.14 IC2.7 IC2.14 IC6.7 IC6.14 IC7.7 IC7.14 SN1.0 SN2.0 SN3.0 SN4.0 TOOLHOLE1_1.TOOL TOOLHOLE1_1_1.TOOL TOOLHOLE5_1.TOOL1 TOOLHOLE5_1_1.TOOL1

## Keep-outs
Keep-Out Layer:
  lines w0.5: 0,0 80,0 80,90 0,90 0,0

## Silkscreen, mask and mechanical layers (free items; w line width, h text height)
Top Overlay:
  text "5V" at 52.959,83.848 h2 r90
  text "3V" at 24.003,69.37 h2
  text "LPCB279R0" at 79.502,1.016 h3 r90
  text "SOL1" at 14.986,-29.21 h2 r90
Top Paste:
  lines w1: -22.647,-15.577 177.353,-15.577 177.353,197.423 -22.647,197.423 -22.647,-15.577
Mechanical 1:
  lines w0.1: -8,-9 -8,100 88,100 88,-9 -8,-9
  lines w0.127: 0,0 0,90 80,90 80,0 0,0
Mechanical 3:
  lines w2.4: -1.2,50.009 -1.2,-1.2 20.644,-1.2 ; -1.2,56.105 -1.2,91.2 34.741,91.2 ; 26.105,-1.2 81.2,-1.2 81.2,55.597 ; 40.837,91.2 81.2,91.2 81.2,61.693
Mechanical 4:
  lines w0.203: 74.158,-44.783 112.099,-44.783 ; 112.059,-55.215 74.167,-55.223 74.167,-23.219 112.059,-23.215 ; 112.099,-55.222 112.099,-23.222
  lines w0.305: 112.751,-52.533 188.696,-52.536 ; 112.751,-48.533 188.696,-48.523 ; 112.751,-44.777 188.696,-44.793 ; 112.756,-44.77 188.701,-44.786 ; 112.756,-41.045 188.701,-41.048 ; 112.756,-37.045 188.701,-37.035 ; 112.756,-33.045 188.701,-33.047 ; 113.059,-29.215 188.559,-29.215 264.559,-29.215 ; 113.059,-28.715 188.559,-28.715 ; 125.349,-55.972 125.349,-23.222 ; 138.099,-55.972 138.099,-23.222 ; 150.849,-55.972 150.849,-23.222 ; 162.849,-55.972 162.849,-23.222 ; 177.215,-56.01 177.215,-23.244 ; 188.701,-48.544 264.698,-48.544 ; 188.726,-41.051 264.749,-41.051 ; 199.904,-56.037 199.904,-48.544 ; 218.724,-56.037 218.724,-48.544 ; 242.617,-56.09 242.617,-48.507 ; 242.701,-48.544 242.701,-41.051
  lines w0.508: -120.29,-16.032 -115.286,-16.032 ; -120.29,28.951 -115.286,28.951 ; -120.29,73.935 -115.286,73.935 ; -120.29,118.943 -115.286,118.943 ; -120.29,163.927 -115.286,163.927 ; -55.291,-61.041 -55.291,-56.037 ; -55.291,203.957 -55.291,208.961 ; -2.993,203.957 -2.993,208.961 ; 9.707,-61.041 9.707,-56.037 ; 55.343,203.969 55.343,208.973 ; 74.706,-61.041 74.706,-56.037 ; 112.809,-55.965 112.809,-23.215 264.559,-23.215 ; 139.704,-61.041 139.704,-56.037 ; 139.704,203.957 139.704,208.961 ; 188.697,-23.259 188.701,-56.037 ; 204.703,-61.041 204.703,-56.037 ; 204.703,203.957 204.703,208.961 ; 264.698,-16.032 269.702,-16.032 ; 264.698,28.951 269.702,28.951 ; 264.723,73.935 269.702,73.935 ; 264.723,118.943 269.702,118.943 ; 264.723,163.927 269.702,163.927 ; -120.29,-61.041 269.702,-61.041 269.702,208.961 -120.29,208.961 -120.29,-61.041 ; -115.286,-56.037 264.723,-56.037 264.723,203.957 -115.286,203.957 -115.286,-56.037
  text "1" at -85.289,204.948 h3
  text "2" at -37.994,204.948 h3
  text "3" at 39.705,204.948 h3
  text "4" at 103.713,204.948 h3
  text "5" at 172.724,204.948 h3
  text "6" at 233.71,204.948 h3
  text "A" at -118.283,182.951 h3
  text "A" at 265.714,182.951 h3
  text "B" at 265.714,139.924 h3
  text "B" at -118.283,138.933 h3
  text "C" at -118.283,93.95 h3
  text "C" at 265.714,93.95 h3
  text "D" at -118.283,48.966 h3
  text "D" at 265.714,48.966 h3
  text ".PCB_FILE_NAME_NO_PATH" at 272.543,32.303 h1.52 r90
  text "FILENAME:" at 272.416,21.635 h1.52 r90
  text "E" at -118.283,3.958 h3
  text "E" at 265.714,3.958 h3
  text "SIL3_PCBTEMPLATE_A3.PCB" at 272.67,-10.75 h1.52 r90
  text "TEMPLATE:" at 272.521,-22.72 h1.52 r90
  text "ISSUE" at 115.559,-26.715 h2.01
  text "DATE" at 128.059,-26.715 h2.01
  text "ECN" at 141.559,-26.715 h2.01
  text "DRAWN" at 152.559,-26.715 h2.01
  text "APP" at 179.559,-26.715 h2.01
  text "SIL3 Pty Ltd" at 75.693,-26.752 h2.54
  text "CHECKED" at 164.134,-26.8 h2.01
  text ".SIL3_PROJECT" at 205.106,-27.26 h1.78
  text "PROJECT:" at 190.305,-27.389 h2.01
  text "Factory 10" at 75.541,-30.308 h1.52
  text "R1.0" at 115.16,-32.124 h2.01
  text "PCB DESCRIPTION:" at 190.559,-32.215 h2.01
  text "01.08.12" at 126.259,-32.342 h2.01
  text "LJG" at 153.768,-32.378 h2.01
  text "9-13 Dingley Avenue" at 75.541,-33.229 h1.52
  text "Dandenong, VICTORIA, 3175" at 75.541,-35.769 h1.52
  text ".SIL3_PCB_DESC" at 190.501,-37.166 h2.5
  text "AUSTRALIA" at 75.541,-38.436 h1.52
  text "F" at -118.283,-41.051 h3
  text "F" at 265.714,-41.051 h3
  text "http://www.sil3.com.au" at 75.541,-41.103 h1.52
  text "LAYER" at 243.46,-43.897 h2.01
  text "ASSY. NUMBER:" at 190.501,-44.532 h2.01
  text ".SIL3_LDLREV" at 214.123,-46.056 h3
  text ".DATE_PRINT" at 272.559,-47.215 h1.52 r90
  text "GENERAL TOLERANCE:" at 81.66,-47.831 h1.52
  text "+" at 87.248,-50.498 h1.27
  text "CLASIFFICATION:" at 242.965,-50.883 h2.01
  text "0.2 mm" at 89.788,-51.006 h1.65
  text "SCALE:" at 189.516,-51.033 h2.01
  text "SHEET" at 206.71,-51.033 h2.01
  text "-" at 87.248,-51.641 h1.27
  text "UNLESS OTHERWISE SPECIFIED" at 77.85,-54.054 h1.52
  text "1 OF 1" at 205.36,-54.438 h2.01
  text "NTS" at 190.627,-54.591 h2.01
  text "UNCLASSIFIED" at 244.235,-54.693 h2.03
  text "A3" at 265.559,-59.715 h1.78
  text "1" at -85.289,-60.05 h3
  text "2" at -25.294,-60.05 h3
  text "3" at 39.705,-60.05 h3
  text "4" at 103.713,-60.05 h3
  text "5" at 172.724,-60.05 h3
  text "6" at 233.71,-60.05 h3
  text "PRINT DATE:" at 272.521,-60.66 h1.52 r90

## Text inside footprints (layer, text, board x,y; h text height)
CN10: Top Overlay "J4" at 56.438,87.09 h2; Top Overlay "J3" at 15.818,87.09 h2; Top Overlay "J2" at 58.978,87.09 h2; Top Overlay "J1" at 13.278,87.09 h2
LBL1: Top Overlay "rloop.org" at 70.219,84.701 h1